# EAGLE board motor12v (EAGLE 7.2.0)
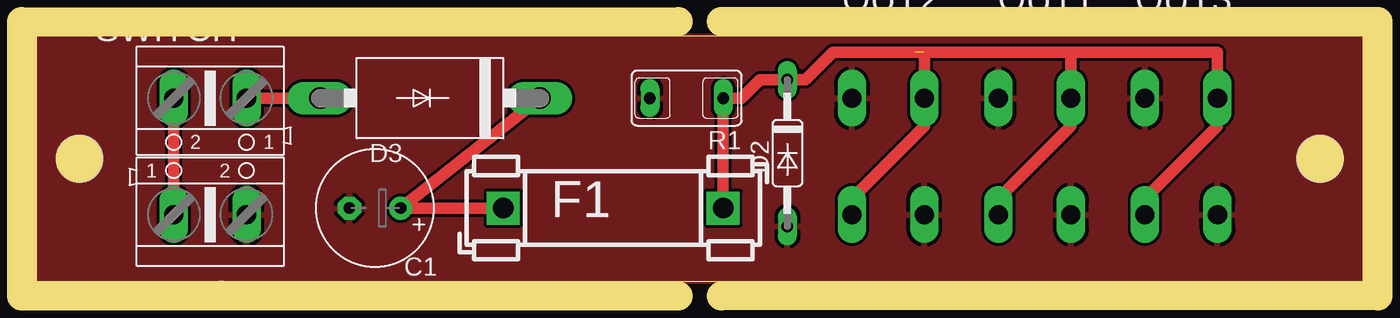
[diagram p0: board, top side]
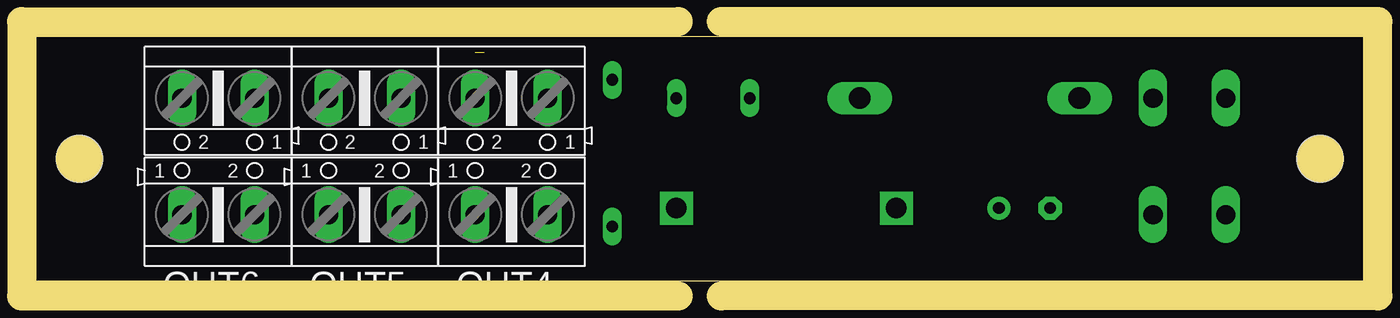
[diagram p1: board, bottom side, seen from below]

Size 92 x 17 mm. Coordinates in mm from the lower left corner, seen from the top.
Outline: 0,0 92,0 92,17 0,17 0,0
Copper layers (1*16): Top 0.035mm / dielectric 1.5mm / Bottom 0.035mm
Design rules "default *": minimum track width 10mil, minimum drill 24mil, track to track 8mil, track to pad 8mil, pad to pad 8mil, via to via 8mil, smd to smd 8mil, copper to edge 0mil, drill to drill 8mil, minimum pad ring 10mil, minimum via ring 8mil, stop-mask expansion 4mil, vias tented up to drill 0mil, thermal gap 10mil
Holes 3.2 mm at 89,8.5 3,8.5
Milling: area 2.4,7.9 to 3.6,9.1; area 88.4,7.9 to 89.6,9.1; 6 lines

## Footprints (pad centres in the part's own frame; a part is rotated, then mirrored left to right if it is on the bottom)
E3,5-8 = drill 0.813 pad 1.6: + -1.778,0 | drill 0.813 pad 1.6 octagon: - 1.778,0
DO35-10 = drill 0.813 long: A 5.08,0; C -5.08,0
DO201-15 = drill 1.499 long: A 7.62,0; C -7.62,0
FUSE_HOLDER_5X20MM = drill 1.422 pad 2.286 square: 1 0,0; 2 15.24,0
AK500/2 = drill 1.321 long: 1 -2.515,0; 2 2.515,0
S2220 = drill 0.813 long: 1 -2.54,0; 2 2.54,0

## Placement (x,y rotation side)
C1  100uF  [E3,5-8]  23.5,5.08 180 top
D2  1N4148DO35-10  [DO35-10]  52.07,8.89 270 top
D3  1N5400  [DO201-15]  27.3,12.7 180 top
F1  FUSEBLANK_5X20MM  [FUSE_HOLDER_5X20MM]  32.38,5.08 0 top
IN12V  [AK500/2]  12.06,4.63 0 top
OUT1  [AK500/2]  69.22,12.7 180 bottom
OUT2  [AK500/2]  59.05,12.7 180 bottom
OUT3  [AK500/2]  79.38,12.7 180 bottom
OUT4  [AK500/2]  59.05,4.63 0 bottom
OUT5  [AK500/2]  69.22,4.63 0 bottom
OUT6  [AK500/2]  79.38,4.63 0 bottom
R1  S2220  [S2220]  45.09,12.7 180 top
SWITCH  [AK500/2]  12.06,12.7 180 top

## Library data of the parts
C1 = resistor
D2 D3 = diode
F1 = fuse; OC_FARNELL: unknown; OC_NEWARK: unknown
IN12V OUT1-OUT6 SWITCH = con-ptr500; OC_FARNELL: unknown; OC_NEWARK: unknown
R1 = varistor

## Nets
+12V: IN12V.1 SWITCH.2
EN21: C1.+ D3.C F1.1
GND: C1.- D2.A IN12V.2 OUT1.1 OUT2.1 OUT3.1 OUT4.1 OUT5.1 OUT6.1 R1.2
IN12V: D3.A SWITCH.1
OUT_+12V: D2.C F1.2 OUT1.2 OUT2.2 OUT3.2 OUT4.2 OUT5.2 OUT6.2 R1.1

## Tracks (layer width: path | path; a pad name or v marks a point on that pad's centre or on a via)
+12V
  Top 0.813: SWITCH.2 IN12V.1
EN21
  Top 0.813: D3.C C1.+ F1.1
GND
  pour Top: 0,0 0,17 92,17 92,0
IN12V
  Top 0.813: SWITCH.1 D3.A
OUT_+12V  (1 unrouted)
  Top 0.813: 71.73,15.88 81.89,15.88 OUT3.2 81.89,10.77 76.86,5.74 OUT6.2 | 71.73,15.88 60.96,15.88 | F1.2 R1.1 48.9,12.7 50.16,13.97 D2.C 53.34,13.97 55.24,15.88 61.57,15.88 OUT2.2 61.57,10.77 56.54,5.74 OUT4.2 | 71.73,15.88 OUT1.2 71.73,10.77 66.7,5.74 OUT5.2